# Altium PCB MC0202_V0.90.pcbdoc (part 3 of 3)
Units mm, origin at the board's own origin, x right, y up, seen from the top; angles counter-clockwise.
Board outline 121 x 80 mm, 4 copper layers (Top Layer, Mid-Layer 1, Mid-Layer 2, Bottom Layer); 203 components, 207 nets, 836 pads, 317 vias.
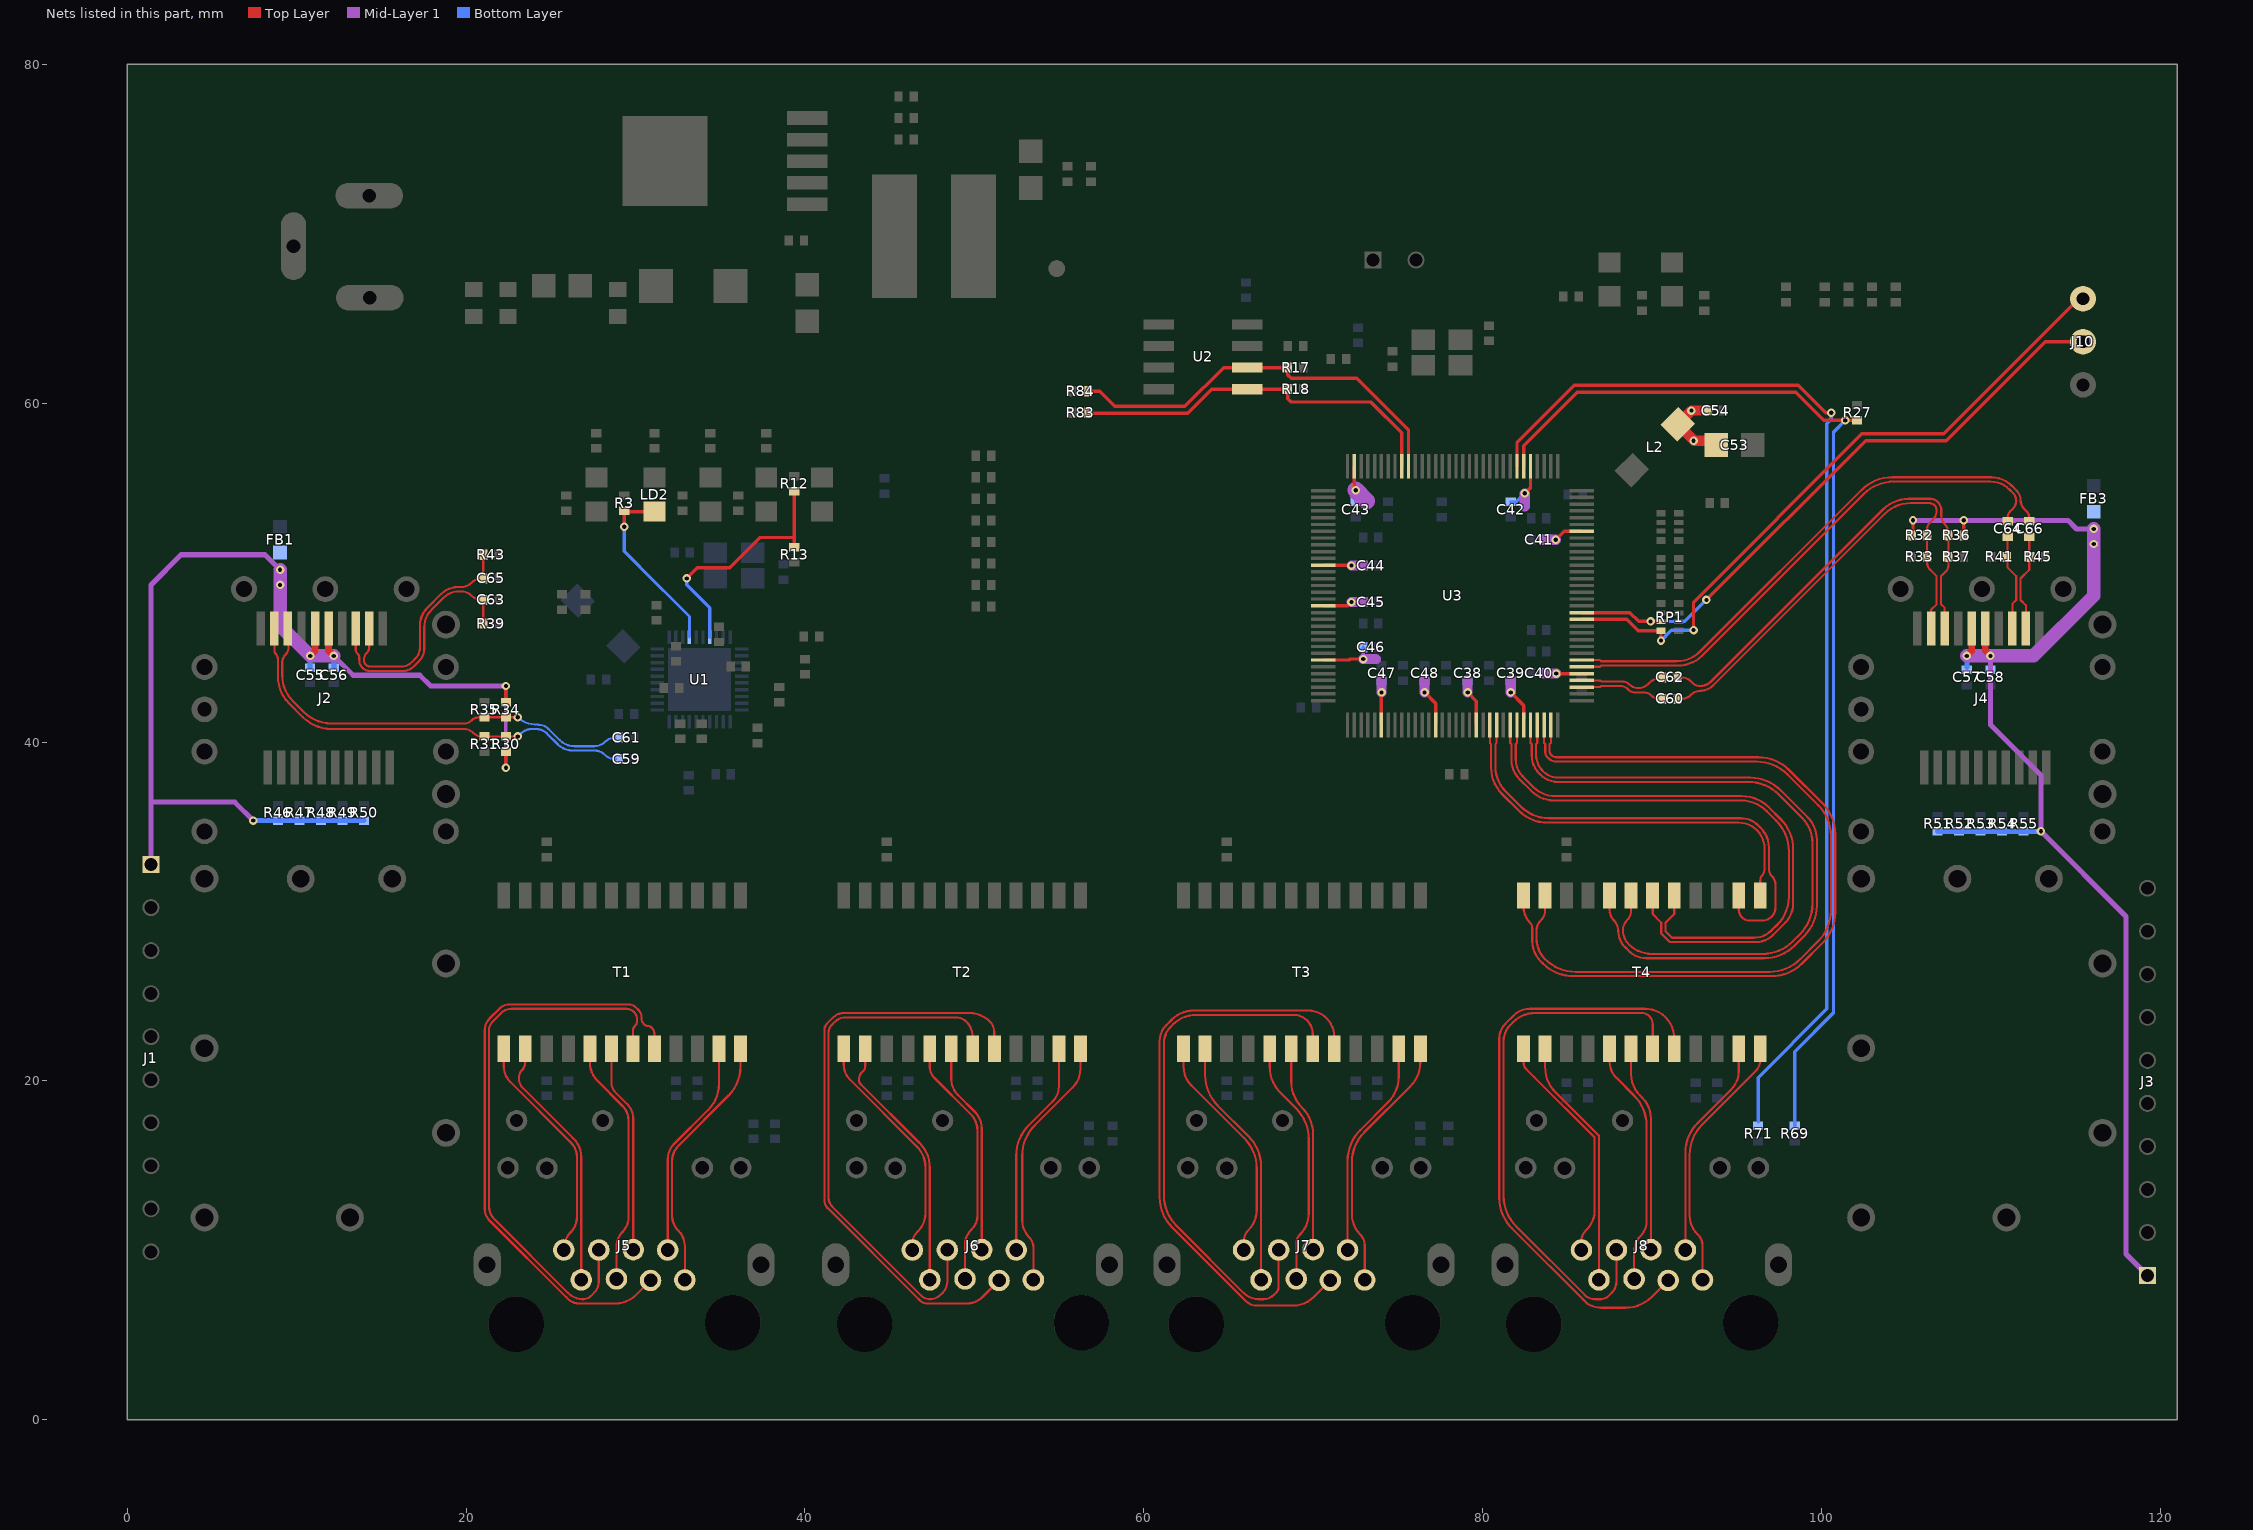
[diagram p5: the nets of this part, all layers, seen from the top]

## Via types
v1: diameter 0.5, hole 0.25, Top Layer to Bottom Layer, 313 vias
v2: diameter 2, hole 1.9, Top Layer to Bottom Layer, 4 vias

## Nets (pads, with @x,y where several pads share a name; then routed paths per layer and width w, separated by ;. In a path a pad name is that pad's centre, name@x,y a point inside that pad or via, vN(x,y) a via of type N, cw(c..) or ccw(c..) an arc to the next point about the centre after c; other vN are vias at no path point) (continued)
P4_ETH_AN: T4.2 U3.23 | length 29
  Top Layer w0.127: U3.23@80.832,41.011 80.832,39.951 80.759,39.878 80.759,38.537 ccw(c82.814,38.537) 81.36,37.085 ccw(c82.814,38.537) 81.361,37.084 82.25,36.195 ccw(c83.935,37.88) 83.935,35.497 95.25,35.497 cw(c95.25,34.031) 96.287,35.068 96.426,34.928 cw(c95.28,33.782) 96.901,33.782 96.901,32.53 ; T4.2@95.123,30.941 95.123,30.099 ccw(c95.758,30.099) 95.25,29.718 ccw(c95.758,30.099) 95.377,29.591 ccw(c95.758,30.099) 95.758,29.464 96.524,29.464 ccw(c96.524,30.226) 96.845,29.535 ccw(c96.524,30.226) 97.215,29.905 ccw(c96.524,30.226) 97.286,30.226 97.286,31.601 ccw(c96.629,31.601) 97.094,32.065 cw(c97.558,32.53) 96.901,32.53 ; 96.901,32.512 96.901,32.53 ; 96.901,32.893 96.901,32.53
P4_ETH_AP: T4.1 U3.22 | length 24.4
  Top Layer w0.127: U3.22@80.432,41.011 80.432,39.939 80.505,39.866 80.505,38.497 ccw(c82.717,38.497) 81.153,36.933 82.12,35.966 ccw(c83.916,37.762) 83.59,35.243 95.119,35.243 cw(c95.119,33.715) 96.2,34.796 cw(c95.119,33.715) 96.647,33.715 96.647,32.545 ; T4.1@96.393,30.941 96.393,31.814 cw(c96.987,31.814) 96.444,32.056 ccw(c95.956,32.545) 96.58,32.248 ccw(c95.956,32.545) 96.647,32.545 ; 96.647,32.893 96.647,32.545
P4_ETH_BN: T4.6 U3.26 | length 36.1
  Top Layer w0.127: U3.26@82.032,41.011 82.032,39.951 81.959,39.878 81.959,38.989 ccw(c83.406,38.989) 82.382,37.966 ; 82.383,37.966 83.011,37.338 ccw(c84.294,38.621) 84.294,36.807 95.317,36.807 cw(c95.317,34.567) 96.901,36.15 97.592,35.459 cw(c95.796,33.663) 98.336,33.663 98.336,30.456 cw(c96.753,30.456) 97.872,29.337 97.133,28.597 ; T4.6@90.043,30.941 90.043,29.845 90.551,29.337 90.551,28.702 91.059,28.194 96.159,28.194 ccw(c96.159,29.571) 97.132,28.597
P4_ETH_BP: T4.5 U3.25 | length 35.2
  Top Layer w0.127: U3.25@81.632,41.011 81.632,39.939 81.705,39.866 81.705,38.941 ccw(c83.289,38.941) 82.169,37.82 82.896,37.093 ccw(c84.201,38.397) 84.201,36.553 95.243,36.553 cw(c95.243,34.387) 96.773,35.919 cw(c95.243,34.387) 96.774,35.918 97.338,35.354 cw(c95.542,33.558) 98.082,33.558 98.082,30.861 cw(c95.776,30.861) 97.407,29.23 97.057,28.881 cw(c96.012,29.926) 96.012,28.448 91.186,28.448 90.805,28.829 90.805,29.337 91.313,29.845 T4.5@91.313,30.941
P4_ETH_CN: T4.8 U3.29 | length 41.3
  Top Layer w0.127: U3.29@83.232,41.011 83.232,39.951 83.159,39.878 83.159,39.256 ccw(c84.549,39.256) 83.566,38.273 ccw(c84.474,39.181) 84.474,37.897 95.799,37.897 cw(c95.799,35.357) 97.595,37.153 99.188,35.56 cw(c97.874,34.245) 99.733,34.245 99.733,30.346 cw(c97.193,30.346) 98.989,28.55 98.418,27.979 cw(c96.622,29.775) 96.622,27.235 89.662,27.235 cw(c89.662,28.663) 88.829,27.503 cw(c89.662,28.663) 88.652,27.653 88.404,27.901 cw(c89.354,28.851) 88.259,28.073 cw(c89.354,28.851) 88.011,28.851 ccw(c87.144,28.851) 87.758,29.463 cw(c88.37,30.077) 87.503,30.077 T4.8@87.503,30.941
P4_ETH_CP: T4.7 U3.28 | length 40.4
  Top Layer w0.127: U3.28@82.832,41.011 82.832,39.939 82.905,39.866 82.905,39.22 ccw(c84.463,39.22) 83.361,38.119 83.4,38.08 ccw(c84.455,39.135) 84.455,37.643 95.694,37.643 cw(c95.694,35.103) 97.49,36.899 98.861,35.528 cw(c97.368,34.036) 99.479,34.036 99.479,30.451 cw(c96.939,30.451) 99.042,29.027 cw(c96.939,30.451) 98.735,28.655 98.313,28.233 cw(c96.517,30.029) 96.517,27.489 90.002,27.489 cw(c90.002,29.42) 88.637,28.055 ; 88.636,28.055 cw(c89.483,28.901) 88.286,28.901 cw(c89.082,28.901) 88.519,29.464 ccw(c87.906,30.077) 88.773,30.077 T4.7@88.773,30.941
P4_ETH_DN: T4.12 U3.31 | length 49.3
  Top Layer w0.127: T4.12@82.423,30.941 82.423,30.257 ccw(c83.724,30.257) 82.804,29.337 cw(c82.497,29.03) 82.931,29.03 82.931,28.277 ccw(c84.665,28.277) 83.439,27.051 83.565,26.925 ccw(c85.361,28.721) 85.361,26.181 97.058,26.181 ccw(c97.058,28.721) 98.854,26.925 100.075,28.146 ccw(c98.279,29.942) 100.819,29.942 100.819,34.574 ccw(c98.279,34.574) 100.075,36.37 98.092,38.353 ccw(c96.296,36.557) 96.296,39.097 84.405,39.097 cw(c84.405,39.595) 84.052,39.243 cw(c84.277,39.468) 83.959,39.468 83.959,39.878 84.032,39.951 U3.31@84.032,41.011
P4_ETH_DP: T4.11 U3.30 | length 48.4
  Top Layer w0.127: U3.30@83.632,41.011 83.632,39.939 83.705,39.866 83.705,39.394 ccw(c84.098,39.394) 83.82,39.116 83.927,39.009 ccw(c84.328,39.41) 84.328,38.843 96.191,38.843 cw(c96.191,36.303) 97.987,38.099 99.821,36.265 cw(c98.025,34.469) 100.565,34.469 100.565,30.045 cw(c98.028,30.045) 99.822,28.252 98.749,27.179 cw(c96.953,28.975) 96.953,26.435 85.487,26.435 cw(c85.487,28.972) 83.693,27.178 cw(c84.919,28.404) 83.185,28.404 83.185,28.851 cw(c84.052,28.851) 83.438,29.463 ccw(c82.826,30.077) 83.693,30.077 T4.11@83.693,30.941
P4_LED0: R27.1 R69.1 U3.70 | length 65.8
  Top Layer w0.2: U3.70@82.432,56.271 82.432,57.122 82.432,57.494 85.588,60.65 98.481,60.65 100.145,58.986 v1(101.404,58.986) R27.1@102.108,58.986
  Bottom Layer w0.2: R69.1@98.425,17.341 98.425,21.717 100.717,24.009 100.717,58.299 v1(101.404,58.986)
P4_LED1: R71.1 U3.71 | length 65.6
  Top Layer w0.2: U3.71@82.032,56.271 82.032,57.288 82.032,57.66 85.422,61.05 98.647,61.05 100.261,59.436 v1(100.584,59.436)
  Bottom Layer w0.2: 96.266,17.595 96.266,20.193 100.317,24.244 100.317,58.788 100.584,59.055 v1(100.584,59.436)
P5_HSIN: C66.2 U3.39 | length 32
  Top Layer w0.127: U3.39@85.862,44.841 86.922,44.841 86.995,44.768 91.459,44.768 ccw(c91.459,46.717) 92.836,45.338 ; 92.837,45.339 102.38,54.882 cw(c104.176,53.086) 104.176,55.626 110.026,55.626 cw(c110.026,53.892) 111.252,55.118 111.535,54.835 ; 111.536,54.834 cw(c110.993,54.292) 111.76,54.292 ccw(c112.527,54.292) 111.984,53.751 ; 111.985,53.75 112.126,53.609 cw(c111.784,53.267) 112.268,53.268 cw(c111.784,53.267) C66.2@112.268,53.267
P5_HSIP: C64.2 U3.38 | length 31.9
  Top Layer w0.127: U3.38@85.862,44.441 86.934,44.441 87.007,44.514 91.548,44.514 ccw(c91.548,46.501) 92.952,45.095 ; 92.953,45.096 102.495,54.638 cw(c104.267,52.867) 104.267,55.372 109.982,55.372 cw(c109.982,53.786) 111.103,54.908 ; C64.2@110.998,53.028 110.998,53.248 cw(c111.528,53.248) 111.153,53.622 111.319,53.788 ccw(c110.866,54.24) 111.506,54.24 ccw(c110.866,54.24) 111.319,54.692 ; 111.103,54.908 111.319,54.692
P5_HSON: C60.2 U3.35 | length 5
  Top Layer w0.127: U3.35@85.862,43.241 86.934,43.241 87.007,43.314 88.111,43.314 cw(c88.111,42.652) 88.579,43.12 88.593,43.106 ccw(c89.027,43.539) 89.027,42.926 89.52,42.926 cw(c89.52,42.276) 89.979,42.736 ccw(c90.439,43.195) 90.439,42.545 C60.2@90.609,42.545
P5_HSOP: C62.2 U3.36 | length 5.1
  Top Layer w0.127: U3.36@85.862,43.641 86.922,43.641 ccw(c87.098,43.817) 87.098,43.568 88.265,43.568 cw(c88.265,43.024) 88.649,43.409 ccw(c89.202,43.961) 89.202,43.18 ccw(c89.202,43.985) 89.77,43.415 ; 89.771,43.416 89.86,43.505 cw(c90.609,42.755) C62.2@90.609,43.815
RJ1_AN: J5.2 T1.23 | length 13
  Top Layer w0.127: J5.2@31.901,10.015 31.901,15.367 cw(c33.186,15.367) 32.277,16.275 34.29,18.288 ccw(c32.757,19.821) 34.291,18.289 ccw(c32.757,19.821) 34.925,19.821 T1.23@34.925,21.891
RJ1_AP: J5.1 T1.24 | length 15.4
  Top Layer w0.127: J5.1@32.913,8.247 32.913,10.239 ccw(c31.619,10.239) 32.534,11.154 cw(c33.449,12.069) 32.155,12.069 32.155,15.24 cw(c33.492,15.24) 32.547,16.186 35.492,19.131 ; 35.492,19.131 ccw(c33.795,20.828) 36.195,20.828 T1.24@36.195,21.891
RJ1_BN: J5.6 T1.19 | length 33.1
  Top Layer w0.127: 22.07,24.003 21.565,23.498 ccw(c22.076,22.987) 21.354,22.987 21.354,12.621 ccw(c22.499,12.621) 21.689,11.811 26.035,7.465 ; 22.071,24.004 cw(c22.683,23.39) 22.683,24.257 29.464,24.257 cw(c29.464,23.644) 29.898,24.077 29.919,24.056 cw(c29.486,23.622) 30.099,23.622 30.099,23.548 cw(c29.665,23.548) 29.972,23.241 ccw(c30.279,22.934) 29.845,22.934 T1.19@29.845,22.098 ; 26.036,7.464 ccw(c26.888,8.318) 26.888,7.112 26.924,7.112 ccw(c26.924,7.725) 27.358,7.292 27.559,7.493 ccw(c26.896,8.156) 27.834,8.156 J5.6@27.834,10.019
RJ1_BP: J5.3 T1.20 | length 36
  Top Layer w0.127: J5.3@30.887,8.218 30.036,7.366 cw(c28.809,8.592) 28.809,6.858 26.67,6.858 cw(c26.67,7.792) 26.009,7.132 25.908,7.233 21.386,11.755 cw(c22.076,12.446) 21.1,12.446 21.1,22.987 cw(c22.076,22.987) 21.386,23.678 21.971,24.263 cw(c22.57,23.664) 22.57,24.511 29.613,24.511 cw(c29.613,23.95) 30.009,24.347 30.173,24.183 cw(c29.74,23.749) 30.353,23.749 30.353,23.675 ccw(c30.787,23.675) 30.48,23.368 30.517,23.331 ccw(c30.734,23.548) 30.734,23.241 cw(c30.734,22.934) 30.951,23.151 cw(c30.554,22.755) 31.115,22.755 T1.20@31.115,21.891
RJ1_CN: J5.5 T1.17 | length 13.8
  Top Layer w0.127: 27.305,21.082 ccw(c28.838,21.082) 27.754,19.998 29.232,18.52 cw(c28.365,17.653) 29.591,17.653 29.591,11.969 cw(c28.29,11.969) 29.21,11.049 ccw(c30.013,10.246) 28.904,10.489 ccw(c30.013,10.246) 28.878,10.246 J5.5@28.878,8.304
RJ1_CP: J5.4 T1.18 | length 12.4
  Top Layer w0.127: T1.18@28.575,21.891 28.575,19.917 ccw(c29.442,19.917) 28.828,19.305 29.595,18.538 ; 29.518,18.622 cw(c28.676,17.78) 29.595,18.538 ; J5.4@29.867,10.036 29.867,17.78 ccw(c28.676,17.78) 29.595,18.538
RJ1_DN: J5.8 T1.13 | length 13.8
  Top Layer w0.127: T1.13@22.225,21.891 22.225,20.859 ccw(c23.526,20.859) 22.606,19.939 26.035,16.51 26.188,16.357 ; J5.8@25.766,10.015 25.766,10.094 cw(c27.117,10.094) 26.162,11.049 ccw(c25.237,11.974) 26.545,11.974 26.545,15.494 ccw(c25.324,15.494) 26.188,16.357
RJ1_DP: J5.7 T1.14 | length 15.2
  Top Layer w0.127: T1.14@23.495,21.891 23.495,21.097 cw(c22.845,21.097) 23.305,20.638 ccw(c23.764,20.178) 23.114,20.178 23.114,20.171 ccw(c23.981,20.171) 23.367,19.559 26.289,16.637 26.352,16.574 cw(c25.272,15.494) 26.799,15.494 J5.7@26.799,8.251
RJ2_AN: J6.2 T2.23 | length 12.8
  Top Layer w0.127: J6.2@52.475,10.015 52.475,15.587 cw(c55.015,15.587) 53.219,17.383 54.632,18.796 ; 54.633,18.797 ccw(c53.765,19.663) 54.991,19.663 T2.23@54.991,21.891
RJ2_AP: J6.1 T2.24 | length 15.1
  Top Layer w0.127: J6.1@53.487,8.247 53.487,10.16 ccw(c52.616,10.16) 53.232,10.776 cw(c54.197,11.741) 52.832,11.741 52.832,15.585 cw(c55.372,15.585) 53.576,17.381 55.812,19.617 ccw(c54.728,20.701) 56.261,20.701 T2.24@56.261,21.891
RJ2_BN: J6.6 T2.19 | length 32
  Top Layer w0.127: J6.6@48.408,10.019 48.408,8.156 cw(c47.47,8.156) 48.133,7.493 48.021,7.381 cw(c47.371,8.032) 47.371,7.112 cw(c47.371,7.819) 46.871,7.319 41.617,12.573 cw(c42.136,13.092) 41.402,13.092 41.402,22.86 cw(c42.015,22.86) 41.582,23.294 41.768,23.48 cw(c42.418,22.829) 42.418,23.749 48.917,23.749 cw(c48.917,22.882) 49.031,23.741 cw(c48.917,22.882) 49.53,23.495 cw(c48.61,22.575) 49.911,22.575 T2.19@49.911,22.098
RJ2_BP: J6.3 T2.20 | length 35.6
  Top Layer w0.127: 41.34,12.491 46.719,7.112 46.781,7.05 ; 41.34,12.491 cw(c41.803,12.954) 41.148,12.954 41.148,23.009 cw(c41.656,23.009) 41.296,23.368 41.678,23.749 cw(c42.291,23.136) 42.291,24.003 49.701,24.003 cw(c49.701,22.269) 50.927,23.495 cw(c50.314,22.882) 51.181,22.882 T2.20@51.181,21.891 ; 46.781,7.05 ccw(c47.244,7.513) 47.244,6.858 49.563,6.858 ccw(c49.563,8.159) 50.482,7.239 J6.3@51.461,8.218
RJ2_CN: J6.5 T2.17 | length 14.9
  Top Layer w0.127: T2.17@47.371,21.891 47.371,20.806 ccw(c48.238,20.806) 47.624,20.194 49.784,18.034 ; J6.5@49.452,8.304 49.452,10.323 cw(c50.708,10.323) 49.819,11.211 49.844,11.236 ccw(c49.015,12.065) 50.187,12.065 50.187,17.06 ccw(c48.81,17.06) 49.785,18.033
RJ2_CP: J6.4 T2.18 | length 12.5
  Top Layer w0.127: T2.18@48.641,21.891 48.641,20.097 ccw(c49.942,20.097) 49.022,19.177 50.038,18.161 ; 50.039,18.16 cw(c49.064,17.187) 50.441,17.187 J6.4@50.441,10.036
RJ2_DN: J6.8 T2.13 | length 14
  Top Layer w0.127: T2.13@42.291,21.891 42.291,20.955 ccw(c43.517,20.955) 42.65,20.088 46.582,16.156 cw(c45.285,14.859) 47.119,14.859 47.119,12.192 cw(c45.592,12.192) 46.672,11.112 46.609,11.049 ccw(c47.258,10.4) 46.34,10.4 J6.8@46.34,10.015
RJ2_DP: J6.7 T2.14 | length 15.4
  Top Layer w0.127: T2.14@43.561,21.891 43.561,20.881 cw(c43.127,20.881) 43.434,20.574 43.383,20.523 ccw(c43.839,20.066) 43.193,20.066 43.193,20.049 ccw(c43.544,20.049) 43.296,19.801 46.762,16.336 ; 46.762,16.335 cw(c45.285,14.859) 47.373,14.859 J6.7@47.373,8.251
RJ3_AN: J7.2 T3.23 | length 12.9
  Top Layer w0.127: J7.2@72.033,10.015 72.033,15.286 cw(c74.573,15.286) 72.777,17.082 74.422,18.727 ccw(c72.889,20.26) 74.423,18.728 ccw(c72.889,20.26) 75.057,20.26 T3.23@75.057,21.891
RJ3_AP: J7.1 T3.24 | length 15.3
  Top Layer w0.127: J7.1@73.045,8.247 73.045,10.284 ccw(c72.109,10.284) 72.771,10.946 cw(c73.939,12.114) 72.287,12.114 72.287,15.18 cw(c74.827,15.18) 73.031,16.977 75.755,19.7 ; 75.755,19.701 ccw(c74.373,21.082) 76.327,21.082 T3.24@76.327,21.891
RJ3_BN: J7.6 T3.19 | length 32.5
  Top Layer w0.127: 61.596,23.195 ccw(c62.567,22.225) 61.195,22.225 61.195,13.241 ccw(c63.735,13.241) 61.939,11.445 65.913,7.471 ; 61.597,23.195 61.722,23.32 ; 61.723,23.321 cw(c63.109,21.933) 63.109,23.895 68.861,23.895 cw(c68.861,22.779) 69.65,23.568 cw(c68.861,22.779) 69.977,22.779 T3.19@69.977,21.891 ; 65.914,7.47 ccw(c66.78,8.338) 66.78,7.112 67.056,7.112 ccw(c67.056,8.032) 67.706,7.381 67.818,7.493 ccw(c67.462,7.849) 67.966,7.849 J7.6@67.966,10.019
RJ3_BP: J7.3 T3.20 | length 35.8
  Top Layer w0.127: J7.3@71.019,8.218 70.041,7.239 cw(c68.814,8.465) 68.814,6.731 66.675,6.731 cw(c66.675,7.651) 66.025,7 61.685,11.34 cw(c63.481,13.136) 60.941,13.136 60.941,22.352 cw(c62.261,22.352) 61.328,23.285 61.664,23.622 cw(c62.937,22.35) 62.937,24.149 69.697,24.149 cw(c69.697,22.599) 70.793,23.695 cw(c69.697,22.599) 71.247,22.599 T3.20@71.247,21.891
RJ3_CN: J7.5 T3.17 | length 14.5
  Top Layer w0.127: T3.17@67.437,21.891 67.437,20.828 ccw(c69.603,20.828) 67.873,19.525 ccw(c69.603,20.828) 68.071,19.296 69.001,18.366 cw(c67.205,16.57) 69.745,16.57 69.745,12.19 cw(c67.963,12.19) 69.223,10.93 ccw(c69.74,10.414) 69.01,10.414 J7.5@69.01,8.304
RJ3_CP: J7.4 T3.18 | length 12.2
  Top Layer w0.127: T3.18@68.707,21.891 68.707,19.964 ccw(c70.913,19.964) 69.353,18.404 cw(c67.793,16.844) 69.999,16.844 J7.4@69.999,10.036
RJ3_DN: J7.8 T3.13 | length 13.7
  Top Layer w0.127: T3.13@62.357,21.891 62.357,20.828 ccw(c63.89,20.828) 62.806,19.744 65.931,16.619 cw(c64.135,14.823) 66.675,14.823 66.675,12.402 cw(c64.941,12.402) 66.167,11.176 ccw(c66.816,10.527) 65.898,10.527 J7.8@65.898,10.015
RJ3_DP: J7.7 T3.14 | length 14.8
  Top Layer w0.127: T3.14@63.627,21.891 63.627,20.334 ccw(c66.167,20.334) 64.371,18.538 66.187,16.722 cw(c64.391,14.926) 66.931,14.926 J7.7@66.931,8.251
RJ4_AN: J8.2 T4.23 | length 13
  Top Layer w0.127: J8.2@91.972,10.015 91.972,15.736 cw(c94.512,15.736) 92.716,17.532 94.674,19.49 ccw(c93.59,20.574) 95.123,20.574 T4.23@95.123,21.891
RJ4_AP: J8.1 T4.24 | length 15.4
  Top Layer w0.127: J8.1@92.984,8.247 92.984,10.287 ccw(c92.113,10.287) 92.729,10.903 92.692,10.94 cw(c93.817,12.065) 92.226,12.065 92.226,15.631 cw(c94.766,15.631) 92.97,17.427 96.139,20.596 ccw(c95.526,21.209) 96.393,21.209 T4.24@96.393,21.891
RJ4_BN: J8.6 T4.19 | length 32.8
  Top Layer w0.127: 81.63,23.29 ccw(c82.569,22.352) 81.242,22.352 81.242,13.203 ccw(c83.782,13.203) 81.986,11.407 86.028,7.365 ccw(c86.638,7.974) 86.638,7.112 86.995,7.112 ccw(c86.995,7.725) 87.429,7.292 87.63,7.493 ccw(c86.967,8.156) 87.905,8.156 J8.6@87.905,10.019 ; 81.631,23.29 81.812,23.471 ; 81.812,23.472 cw(c83.096,22.187) 83.096,24.003 89.393,24.003 cw(c89.393,23.353) 89.852,23.813 cw(c89.393,23.353) 90.043,23.353 T4.19@90.043,21.891
RJ4_BP: J8.3 T4.20 | length 36.3
  Top Layer w0.127: 85.928,7.092 cw(c85.906,7.039) 85.946,7.08 86.143,6.883 ccw(c86.995,8.044) 86.169,6.865 ; J8.3@90.958,8.218 89.98,7.239 cw(c88.447,8.772) 89.979,7.238 cw(c88.447,8.772) 88.447,6.604 86.995,6.604 cw(c86.995,8.044) 86.169,6.865 ; T4.20@91.313,21.891 91.313,22.523 ccw(c89.579,22.523) 90.805,23.749 ccw(c89.579,22.523) 89.579,24.257 82.777,24.257 ccw(c82.777,22.956) 81.858,23.876 81.349,23.368 ccw(c82.221,22.496) 80.988,22.496 80.988,13.097 ccw(c83.528,13.097) 81.732,11.301 86.169,6.865
RJ4_CN: J8.5 T4.17 | length 14.5
  Top Layer w0.127: T4.17@87.503,21.891 87.503,21.113 ccw(c88.804,21.113) 87.884,20.193 88.94,19.137 cw(c87.144,17.341) 89.684,17.341 89.684,11.719 cw(c88.428,11.719) 89.316,10.83 ccw(c90.205,9.942) 88.949,9.942 J8.5@88.949,8.304
RJ4_CP: J8.4 T4.18 | length 12.2
  Top Layer w0.127: T4.18@88.773,21.891 88.773,20.382 ccw(c90.507,20.382) 89.281,19.155 89.431,19.005 cw(c88.205,17.78) 89.938,17.78 J8.4@89.938,10.036
RJ4_DN: J8.8 T4.13 | length 13.8
  Top Layer w0.127: T4.13@82.423,21.891 82.423,21.082 ccw(c82.984,21.082) 82.587,20.686 83.058,20.215 86.614,16.659 86.614,12.319 cw(c85.081,12.319) 86.165,11.235 86.106,11.176 ccw(c86.755,10.527) 85.837,10.527 J8.8@85.837,10.015
RJ4_DP: J8.7 T4.14 | length 14.9
  Top Layer w0.127: T4.14@83.693,21.891 83.693,20.828 ccw(c85.839,20.828) 84.321,19.311 ; 84.322,19.31 86.87,16.762 J8.7@86.87,8.251
SCL: R17.2 R84.2 U2.6 U3.87 | length 24.1
  Top Layer w0.2: R84.2@56.711,60.706 57.404,60.706 58.293,59.817 62.426,59.817 64.712,62.103 U2.6@66.1,62.103 R17.2@68.453,62.103 ; R17.2@68.511,62.103 68.511,61.664 68.707,61.468 72.575,61.468 75.632,58.411 75.632,58.353 U3.87@75.632,56.271
SDA: R18.2 R83.2 U2.5 U3.88 | length 22.5
  Top Layer w0.2: R83.2@56.711,59.436 56.73,59.417 62.592,59.417 64.008,60.833 U2.5@66.1,60.833 R18.2@68.511,60.833 68.511,60.267 68.707,60.071 73.406,60.071 75.232,58.245 U3.88@75.232,56.271
SFP0_RXN: C65.1 J2.12 R43.2 | length 13.8
  Top Layer w0.127: 14.086,44.566 cw(c14.366,44.846) 13.97,44.846 13.97,44.863 cw(c14.506,44.863) 14.127,45.242 ccw(c13.748,45.621) 14.284,45.621 J2.12@14.284,46.692 ; 14.086,44.566 ccw(c14.366,44.846) 14.366,44.45 16.173,44.45 ccw(c16.173,45.317) 16.785,44.703 17.018,44.936 ccw(c16.405,45.549) 17.272,45.549 17.272,46.863 cw(c18.752,46.863) 17.705,47.909 18.542,48.746 cw(c19.514,47.774) 19.514,49.149 19.707,49.149 ccw(c19.707,50.016) 20.319,49.402 cw(c20.933,48.79) 20.933,49.657 C65.1@21.013,49.657 R43.2@21.013,51.054
SFP0_RXP: C63.1 J2.13 R39.2 | length 14.2
  Top Layer w0.127: J2.13@13.484,46.692 13.484,45.481 ccw(c13.88,45.481) 13.6,45.201 cw(c13.37,44.971) 13.695,44.971 13.695,44.846 ccw(c14.366,44.846) 13.716,44.68 ccw(c14.366,44.846) 13.789,44.504 ccw(c14.366,44.846) 13.892,44.372 ccw(c14.316,44.796) 14.018,44.275 ccw(c14.316,44.796) 14.316,44.196 16.278,44.196 ccw(c16.278,45.063) 16.89,44.449 17.257,44.816 ccw(c16.606,45.466) 17.526,45.466 17.526,46.736 cw(c19.059,46.736) 17.975,47.82 18.669,48.514 cw(c19.589,47.594) 19.589,48.895 19.707,48.895 cw(c19.707,48.028) 20.32,48.641 ccw(c20.933,49.254) 20.321,48.64 ccw(c20.933,49.254) 20.933,48.387 C63.1@21.013,48.387 R39.2@21.013,46.99
SFP0_TXN: C59.1 J2.19 R30.1 R31.2 | length 25.3
  Top Layer w0.127: J2.19@8.684,46.692 8.684,45.402 ccw(c8.953,45.402) 8.763,45.212 cw(c8.456,44.905) 8.89,44.905 8.89,43.877 ccw(c11.132,43.877) 9.547,42.291 10.368,41.47 ; 10.368,41.47 ccw(c12.065,43.167) 12.065,40.767 19.883,40.767 cw(c19.883,40.018) 20.412,40.548 ccw(c20.942,41.077) 20.942,40.328 R31.2@21.082,40.328 R30.1@22.352,40.328 v1(23.056,40.328)
  Bottom Layer w0.127: v1(23.056,40.328) 23.226,40.498 cw(c23.876,39.847) 23.876,40.767 24.13,40.767 cw(c24.13,39.847) 24.78,40.498 25.422,39.856 ; 25.422,39.856 ccw(c26.289,40.723) 26.289,39.497 27.581,39.497 cw(c27.581,38.63) 28.193,39.244 ccw(c28.807,39.856) 28.807,38.989 C59.1@28.887,38.989
SFP0_TXP: C61.1 J2.18 R34.1 R35.2 | length 24.8
  Top Layer w0.127: J2.18@9.525,46.651 9.525,45.608 cw(c8.875,45.608) 9.335,45.149 ccw(c9.794,44.689) 9.144,44.689 9.144,43.942 ccw(c11.29,43.942) 9.772,42.425 ; 9.773,42.424 10.423,41.774 ccw(c12.065,43.416) 12.065,41.094 19.88,41.094 ccw(c19.88,41.719) 20.322,41.277 ; 20.322,41.277 cw(c20.764,40.835) 20.764,41.46 R35.2@21.082,41.46 R34.1@22.352,41.46 v1(23.045,41.46)
  Bottom Layer w0.127: v1(23.045,41.46) 23.048,41.457 ccw(c24.05,42.459) 24.05,41.042 cw(c24.05,39.726) 24.284,41.021 cw(c24.284,40.219) 24.851,40.786 25.527,40.11 ; 25.528,40.109 ccw(c26.394,40.977) 26.394,39.751 27.581,39.751 ccw(c27.581,40.618) 28.193,40.004 cw(c28.807,39.392) C61.1@28.807,40.259
SFP5_RXN: C66.1 J4.12 R45.2 | length 5.8
  Top Layer w0.127: J4.12@112.074,46.692 112.074,48.073 111.76,48.387 111.76,49.657 112.268,50.165 C66.1@112.268,52.128
SFP5_RXP: C64.1 J4.13 R41.2 | length 5.7
  Top Layer w0.127: C64.1@110.998,52.128 110.998,50.292 111.506,49.784 111.506,48.387 111.274,48.155 J4.13@111.274,46.692
SFP5_TXN: C60.1 J4.19 R32.1 R33.2 | length 27.6
  Top Layer w0.127: C60.1@91.509,42.545 91.716,42.545 ccw(c91.716,43.412) 92.328,42.798 cw(c92.887,42.241) 92.887,43.03 ccw(c92.887,44.028) 93.1,43.053 ccw(c92.887,44.028) 93.592,43.322 103.737,53.467 cw(c105.27,51.934) 103.738,53.468 cw(c105.27,51.934) 105.27,54.102 106.373,54.102 cw(c106.373,53.668) 106.68,53.975 cw(c106.373,53.668) 106.807,53.668 cw(c106.014,53.668) 106.575,53.108 106.38,52.913 ccw(c106.714,52.578) 106.241,52.578 R32.1@106.241,52.197 R33.2@106.241,50.927 106.241,50.612 ccw(c106.873,50.612) 106.426,50.165 106.807,49.784 106.807,48.133 106.474,47.8 J4.19@106.474,46.692
SFP5_TXP: C62.1 J4.18 R36.1 R37.2 | length 27.9
  Top Layer w0.127: C62.1@91.509,43.815 91.716,43.815 cw(c91.716,42.948) 92.328,43.562 92.403,43.487 ccw(c92.837,43.92) 92.837,43.307 ccw(c92.837,44.227) 93.487,43.576 103.638,53.727 ; 103.639,53.728 cw(c105.156,52.21) 105.156,54.356 106.424,54.356 cw(c106.424,53.719) 106.745,54.269 cw(c106.424,53.719) 106.874,54.169 cw(c106.374,53.669) 106.98,54.034 cw(c106.374,53.669) 107.061,53.838 cw(c106.374,53.669) 107.082,53.669 107.082,53.347 ccw(c107.761,53.347) 107.28,52.867 cw(c106.751,52.337) 107.5,52.337 R36.1@107.5,52.197 R37.2@107.5,50.927 107.5,50.419 cw(c107.027,50.419) 107.362,50.085 107.061,49.784 107.061,48.133 107.274,47.92 J4.18@107.274,46.692
SFP_3V3A: C55.2 C56.2 FB1.2 J1.1 J2.15 J2.16 R30.2 R34.2 R46.2 R47.2 R48.2 R49.2 R50.2 | length 67.9
  Top Layer w0.2: v1(22.352,38.481) R30.2@22.352,39.428 ; R34.2@22.352,42.36 v1(22.352,43.307)
  Top Layer w0.4: v1(10.795,45.085) 11.084,45.374 J2.16@11.084,46.692 ; J2.15@11.884,46.692 11.884,45.393 v1(12.192,45.085)
  Mid-Layer 1 w0.2: v1(22.352,38.481) v1(22.352,43.307)
  Mid-Layer 1 w0.3: J1.1@1.397,32.766 1.397,36.449 ; v1(7.435,35.364) 6.35,36.449 1.397,36.449 ; v1(9.017,50.165) 8.128,51.054 8.001,51.054 3.175,51.054 1.397,49.276 1.397,36.449 ; v1(12.192,45.085) 13.335,43.942 17.272,43.942 17.907,43.307 v1(22.352,43.307)
  Mid-Layer 1 w0.8: v1(9.017,50.165) v1(9.017,49.276) 9.017,46.863 v1(10.795,45.085) v1(12.192,45.085)
  Bottom Layer w0.3: v1(7.435,35.364) R46.2@8.89,35.364 R50.2@13.97,35.364 ; C55.2@10.795,44.392 v1(10.795,45.085) ; C56.2@12.192,44.392 v1(12.192,45.085)
SFP_3V3B: C57.2 C58.2 FB3.2 J3.1 J4.15 J4.16 R32.2 R36.2 R51.2 R52.2 R53.2 R54.2 R55.2 | length 76.9
  Top Layer w0.2: R32.2@105.41,52.266 v1(105.41,53.086) ; R36.2@108.4,52.197 v1(108.4,53.086)
  Top Layer w0.4: v1(108.585,45.085) 108.874,45.374 J4.16@108.874,46.692 ; J4.15@109.674,46.692 109.674,45.393 v1(109.982,45.085)
  Mid-Layer 1 w0.3: v1(105.41,53.086) v1(108.4,53.086) 114.554,53.086 115.062,52.578 v1(116.078,52.578) ; v1(109.982,45.085) 109.982,41.021 112.961,38.042 v1(112.961,34.729) 117.983,29.707 117.983,9.779 J3.1@119.253,8.509
  Mid-Layer 1 w0.8: v1(108.585,45.085) v1(109.982,45.085) 112.522,45.085 116.078,48.641 v1(116.078,51.689) v1(116.078,52.578)
  Bottom Layer w0.3: R51.2@106.861,34.729 R55.2@111.941,34.729 v1(112.961,34.729) ; C57.2@108.585,44.392 v1(108.585,45.085) ; C58.2@109.982,44.392 v1(109.982,45.085)
SMI_ADDR: LD2.2 R3.2 U1.24 | length 10.8
  Top Layer w0.2: v1(29.337,52.705) R3.2@29.337,53.652 ; R3.2@29.337,53.594 31.099,53.594 LD2.2@31.115,53.61
  Bottom Layer w0.18: 30.226,50.36 33.182,47.404 U1.24@33.182,46.187
  Bottom Layer w0.2: v1(29.337,52.705) 29.337,51.263 30.099,50.501 30.233,50.367
SMI_SEL: R12.1 R13.1 U1.27 | length 14.7
  Top Layer w0.2: v1(33.02,49.657) 33.655,50.292 35.56,50.292 37.338,52.07 39.37,52.07 ; R13.1@39.37,51.504 39.37,52.07 ; R12.1@39.37,54.795 39.37,52.07
  Bottom Layer w0.2: v1(33.02,49.657) 33.02,49.276 34.382,47.914 U1.27@34.382,46.187
URXD: J10.1 RP1.1 U3.45 | length 39.8
  Top Layer w0.2: U3.45@85.862,47.241 88.522,47.241 89.192,46.571 RP1.1@90.534,46.571 v1(90.534,45.991) ; v1(92.456,46.609) 92.456,48.261 102.389,58.195 107.217,58.195 115.189,66.167 J10.1@115.443,66.167
  Bottom Layer w0.2: v1(90.534,45.991) 91.152,46.609 v1(92.456,46.609)
UTXD: J10.2 RP1.3 U3.46 | length 37.2
  Top Layer w0.2: U3.46@85.862,47.641 88.688,47.641 89.208,47.121 RP1.3@90.534,47.121 ; v1(93.218,48.387) 102.616,57.785 107.373,57.785 113.215,63.627 J10.2@115.443,63.627
  Bottom Layer w0.2: v1(89.92,47.117) 91.948,47.117 v1(93.218,48.387)
VDDL: C38.1 C39.1 C40.1 C41.1 C42.1 C43.1 C44.1 C45.1 C46.1 C47.1 C48.1 C53.1 C54.1 L2.2 U3.6 U3.14 U3.20 U3.27 U3.37 U3.58 U3.69 U3.95 U3.108 U3.114 U3.122 | length 41.9
  Top Layer w0.2: U3.122@70.602,44.841 72.136,44.841 72.195,44.9 v1(72.956,44.9) ; U3.114@70.602,48.041 72.044,48.041 v1(72.263,48.26) ; U3.108@70.602,50.441 72.241,50.441 v1(72.263,50.419) ; U3.95@72.432,56.271 72.432,54.949 v1(72.517,54.864) ; U3.6@74.032,41.011 v1@74.032,42.859 ; v1(76.581,42.926) 77.232,42.275 U3.14@77.232,41.011 ; v1(79.121,42.926) 79.632,42.415 U3.20@79.632,41.011 ; v1(81.661,42.926) 82.432,42.155 U3.27@82.432,41.402 ; v1(82.492,54.679) 82.832,55.019 U3.69@82.832,56.271 ; v1(84.328,51.943) 84.826,52.441 U3.58@85.862,52.441 ; v1(84.356,44.041) U3.37@85.862,44.041 ; v1(92.456,57.785) v1@92.489,57.785 ; C53.1@93.535,57.785 C53.1@93.789,57.531
  Top Layer w0.6: C54.1@93.276,59.563 v1(92.329,59.563) L2.2@91.52,58.754 92.489,57.785 C53.1@93.535,57.785
  Mid-Layer 1 w0.2: 82.492,53.975 v1(82.492,54.679)
  Mid-Layer 1 w0.6: v1(72.263,48.26) 73.025,48.26 ; v1(72.263,50.419) 73.025,50.419 ; v1(72.956,44.9) 73.718,44.9 ; v1(74.041,42.926) 74.041,43.688 ; v1(76.581,42.926) 76.581,43.688 ; v1(79.121,42.926) 79.121,43.688 ; v1(81.661,42.926) 81.661,43.688 ; 82.492,53.917 v1(82.492,54.679) ; 83.566,51.943 v1(84.328,51.943) ; 83.594,44.041 v1(84.356,44.041)
  Mid-Layer 1 w1: v1(72.517,54.864) 73.152,54.229
  Bottom Layer w0.2: v1(72.263,48.26) C45.1@72.956,48.26 ; v1(72.263,50.419) C44.1@72.956,50.419 ; C43.1@72.517,54.171 v1(72.517,54.864) ; v1(72.956,44.9) C46.1@72.956,45.593 ; v1(74.041,42.926) C47.1@74.041,43.561 ; v1(76.581,42.926) C48.1@76.581,43.561 ; v1(79.121,42.926) C38.1@79.121,43.619 ; v1(81.661,42.926) C39.1@81.661,43.619 ; C42.1@81.661,54.171 81.984,54.171 v1(82.492,54.679) ; C41.1@83.762,51.943 v1(84.328,51.943) ; C40.1@83.79,44.041 v1(84.356,44.041)
pads on no net: J5.15 J5.16 J6.15 J6.16 J7.15 J7.16 J8.15 J8.16 J9.2 U3.15 U3.16 U3.19
copper on no net:
  other v2: 6.884,42.592 16.484,42.592 104.674,42.592 114.274,42.592

## Polygon pours and split planes (outlines as drawn)
+3.3V on Mid-Layer 1 "3.3V" (solid, remove dead copper, pour order 21): -1.651,81.788 -1.524,81.661 -1.524,-0.762 122.555,-0.762 122.682,-0.889 122.682,17.653 122.682,81.407 123.063,81.788
P0_1V on Mid-Layer 1 "P0_VDDL" (solid, remove dead copper, pour order 19): 26.797,50.038 25.527,50.038 25.146,49.657 25.146,48.768 25.146,48.387 26.035,47.498 29.464,44.069 29.972,44.069 30.353,44.069 30.734,43.688 30.607,43.561 30.607,42.799 30.607,42.672 30.226,42.291 29.972,42.037 29.972,41.593 29.972,41.402 30.353,41.021 32.258,39.116 32.512,39.116 35.179,39.116 37.338,41.275 37.592,41.529 37.592,42.672 37.592,43.561 37.973,43.942 38.1,44.069 38.1,44.831 38.1,44.958 37.719,45.339 37.211,45.847 35.306,45.847 33.782,45.847 33.274,46.355 33.02,46.609 33.02,47.244 32.512,47.752 32.004,47.752 31.75,47.498 31.75,46.99 31.75,45.847 31.623,45.72 30.988,45.72 30.734,45.72 29.972,46.482 27.686,48.768 27.686,49.149 27.686,49.784 27.432,50.038
VDDL on Mid-Layer 1 "HUB_VDDL" (solid, remove dead copper, pour order 17): 72.39,55.372 72.009,54.991 72.009,54.737 72.009,54.61 72.644,53.975 72.644,51.308 72.009,50.673 71.882,50.546 71.882,50.292 71.882,48.26 71.882,48.133 72.39,47.625 72.644,47.371 72.644,47.117 72.644,44.45 72.644,43.688 73.533,42.799 73.66,42.672 74.295,42.672 74.676,43.053 75.184,43.561 75.565,43.561 76.073,43.053 76.454,42.672 76.835,42.672 77.343,43.18 77.597,43.434 77.851,43.434 78.232,43.434 78.613,43.053 78.994,42.672 79.248,42.672 79.629,43.053 80.01,43.434 80.264,43.434 81.153,43.434 81.28,43.307 81.534,43.053 81.534,42.672 82.423,42.672 83.566,42.672 84.455,43.561 84.582,43.688 84.582,44.196 84.582,44.45 84.455,44.577 83.82,45.212 83.82,46.101 83.82,47.752 84.709,48.641 87.566,51.498 87.884,51.498 88.963,51.498 90.297,52.832 93.091,55.626 93.472,55.626 93.98,55.626 94.361,56.007 94.615,56.261 94.615,56.769 94.615,58.674 93.98,59.309 93.218,60.071 92.583,60.071 91.567,60.071 91.186,59.69 90.424,58.928 90.424,58.547 90.424,55.499 89.916,54.991 87.503,52.578 84.582,52.578 83.947,52.578 83.185,53.34 82.804,53.721 82.804,54.102 82.804,54.991 82.677,55.118 82.042,55.118 81.915,55.118 81.407,54.61 81.153,54.356 74.041,54.356 73.787,54.356 73.025,55.118 72.898,55.245 72.898,55.372
no net on Top Layer "TOP_AGND" (solid, remove dead copper, pour order 9): 3.169,-0.38 3.169,49.277 3.55,49.658 3.931,50.039 9.9,50.039 19.298,50.039 19.933,49.404 20.06,49.277 20.06,15.241 20.06,13.209 21.965,11.304 22.346,10.923 24.886,10.923 99.181,10.923 100.705,12.447 100.959,12.701 100.959,15.241 100.959,48.261 102.61,49.912 103.118,50.42 107.563,50.42 115.945,50.42 117.342,49.023 118.104,48.261 118.104,47.118 118.104,-0.126 117.85,-0.38
AGND on Top Layer "Top Layer-AGND" (solid, pour order 30): 26.594,52.883 23.368,49.657 23.368,40.513 25.527,38.354 40.005,38.354 46.228,44.577 46.228,51.816 45.296,52.748
AGND on Top Layer "TOP-GND" (solid, remove dead copper, pour order 28): 9.398,87.469 7.366,84.893 7.366,78.937 7.366,67.347 9.017,65.255 11.303,62.357 33.401,62.357 52.959,62.357 56.261,66.542 58.674,69.601 58.674,78.615 58.674,82.318 54.991,86.986 54.483,87.63 54.356,87.63
AGND on Mid-Layer 2 "GND" (solid, remove dead copper, pour order 11): -1.778,81.915 -1.651,81.788 -1.651,-1.143 123.317,-1.143 122.428,-0.254 122.428,81.534
AGND on Bottom Layer "GND-BOT" (solid, remove dead copper, pour order 26): 0.254,83.82 -0.254,83.82 -3.302,80.772 -7.112,76.962 -7.112,27.559 -7.112,-1.905 -0.762,-8.255 2.159,-11.176 123.825,-11.176 123.825,-9.525 127.635,-5.715 124.968,-3.048 124.968,68.453 124.968,80.264 122.682,82.55

## Keep-outs
Keep-Out Layer:
  the board outline again, w0.254

## Other copper
Top Layer:
  pour cut-out: 38.741,73.625 38.741,72.425 38.903,72.263 43.053,72.263 43.561,71.755 43.561,66.214 44.116,65.659 52.959,65.659 54.61,67.31 54.61,73.279 53.848,74.041 42.418,74.041 42.018,73.641 38.741,73.641
  region net +3.3V: 49.911,73.279 57.023,73.279 57.404,72.898 57.404,72.263 57.023,71.882 54.356,71.882 53.721,71.247 53.721,67.437 52.578,66.294 50.8,66.294 49.911,67.183
Mid-Layer 1:
  pour cut-out: 4.445,49.022 4.445,0.508 116.459,0.508 116.713,0.254 116.713,49.022 102.362,49.022 102.235,48.895 102.235,14.097 19.05,14.097 18.923,14.224 18.923,49.022
Mid-Layer 2:
  rectangle net AGND: 11.684,70.739 17.018,73.914
  pour cut-out: 3.551,49.324 4.265,50.038 19.431,50.038 20.193,49.276 20.193,11.684 20.955,10.922 99.187,10.922 100.965,12.7 100.965,48.565 102.946,50.546 115.57,50.546 118.491,47.625 118.491,-1.016 119.761,-2.286 120.142,-1.905 122.428,-1.905 122.428,1.143 122.682,1.397 121.412,2.667 121.412,49.784 118.745,52.451 102.108,52.451 98.679,49.022 98.679,37.084 94.742,33.147 25.273,33.147 24.346,34.074 24.346,46.52 18.288,52.578 3.429,52.578 -2.413,46.736 -2.413,-1.778 -2.159,-1.778 -1.143,-2.794 -1.016,-2.667 3.551,-2.667
  pour cut-out: 51.562,72.136 50.8,71.374 50.8,67.183 51.435,66.548 53.594,66.548 54.102,67.056 54.102,71.374 53.34,72.136
Bottom Layer:
  region net +3.3V: 115.292,56.653 ccw(c115.292,56.399) 115.038,56.399 115.038,55.361 ccw(c115.292,55.361) 115.292,55.107 116.838,55.107 ccw(c116.838,55.361) 117.092,55.361 117.092,56.399 ccw(c116.838,56.399) 116.838,56.653
  region net SFP_3V3B: 115.697,54.102 ccw(c115.697,53.975) 115.57,53.975 115.57,51.435 ccw(c115.697,51.435) 115.697,51.308 116.459,51.308 ccw(c116.459,51.435) 116.586,51.435 116.586,53.975 ccw(c116.459,53.975) 116.459,54.102
  region net SFP_3V3A: 8.636,51.689 ccw(c8.636,51.562) 8.509,51.562 8.509,49.022 ccw(c8.636,49.022) 8.636,48.895 9.398,48.895 ccw(c9.398,49.022) 9.525,49.022 9.525,51.562 ccw(c9.398,51.562) 9.398,51.689
  region net +3.3V: 8.231,54.24 ccw(c8.231,53.986) 7.977,53.986 7.977,52.948 ccw(c8.231,52.948) 8.231,52.694 9.777,52.694 ccw(c9.777,52.948) 10.031,52.948 10.031,53.986 ccw(c9.777,53.986) 9.777,54.24
  pour cut-out: 3.551,49.324 4.265,50.038 19.431,50.038 20.193,49.276 20.193,11.684 20.955,10.922 99.187,10.922 100.965,12.7 100.965,48.565 102.946,50.546 115.57,50.546 118.491,47.625 118.491,-1.016 119.761,-2.286 120.142,-1.905 122.428,-1.905 122.428,1.143 122.682,1.397 121.412,2.667 121.412,49.784 118.745,52.451 102.108,52.451 98.679,49.022 98.679,37.084 94.742,33.147 25.273,33.147 24.346,34.074 24.346,46.52 18.288,52.578 3.429,52.578 -2.413,46.736 -2.413,-1.778 -2.159,-1.778 -1.143,-2.794 -1.016,-2.667 3.551,-2.667
  pour cut-out: 49.276,73.596 49.276,66.23 53.594,66.23 53.975,66.611 53.975,73.343 53.721,73.596

## Silkscreen, mask and mechanical layers (free items; w line width, h text height)
Top Overlay:
  lines w0.254: 77.592,21.836 81.158,21.836
  text "Engineering Sample V1.0" at 93.218,73.914 h1
  text "Designed By: Hans Kim" at 93.218,71.882 h1
  text "RESET" at 74.676,70.358 h1
  text "RXD" at 111.633,65.659 h1
  text "TXD" at 111.633,63.246 h1